# EAGLE board LogicBoard (EAGLE 9.6.2)
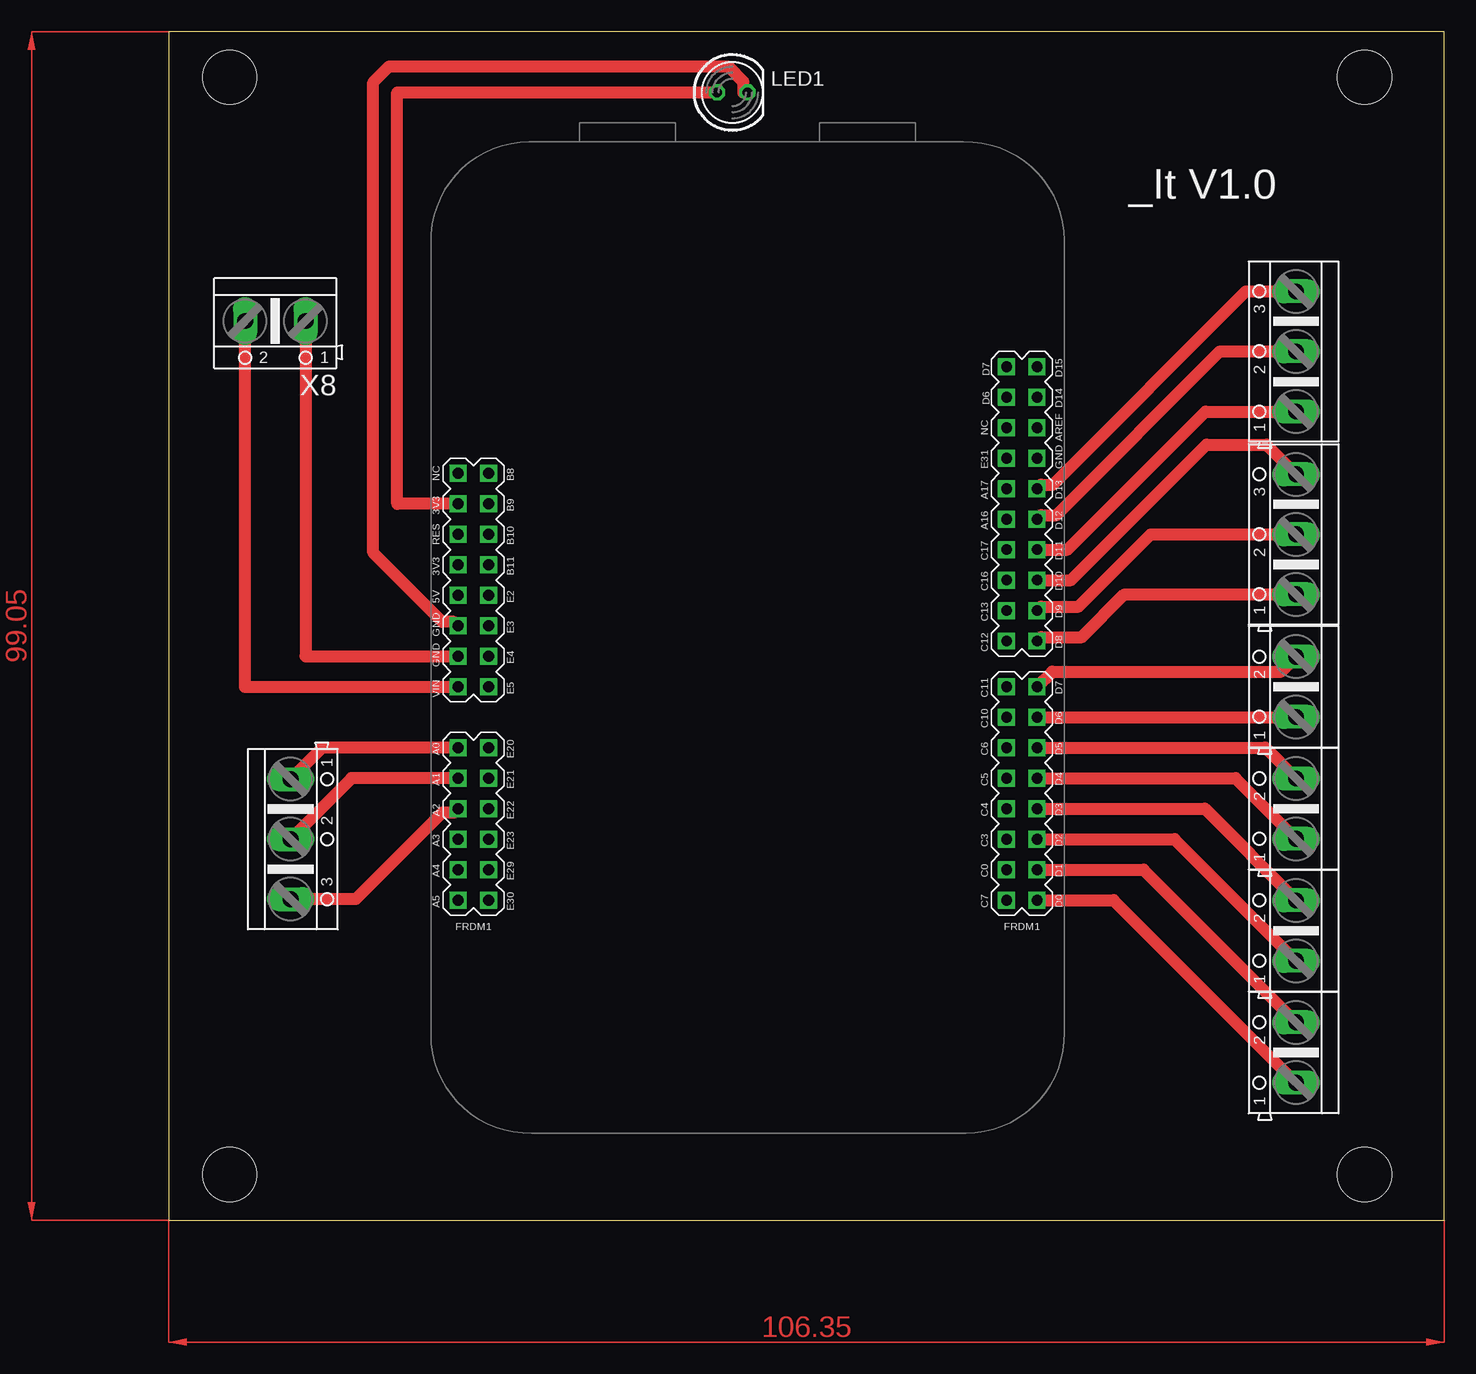
[diagram p0: board, top side]

Size 106.35 x 99.05 mm. Coordinates in mm from the lower left corner, seen from the top.
Outline: 0,0 106.35,0 106.35,99.05 0,99.05 0,0
Copper layers (1*16): Top 0.035mm / dielectric 1.5mm / Bottom 0.035mm
Design rules "default *": minimum track width 1mm, minimum drill 0.35mm, track to track 1mm, track to pad 1mm, pad to pad 6mil, via to via 6mil, smd to smd 6mil, copper to edge 40mil, drill to drill 6mil, minimum pad ring 10mil, minimum via ring 8mil, stop-mask expansion 4mil, vias tented up to drill 0mil, thermal gap 10mil
Holes 4.5 mm at 5.08,3.81 5.08,95.25 99.69,95.25 99.69,3.81

## Footprints (pad centres in the part's own frame; a part is rotated, then mirrored left to right if it is on the bottom)
FRDM_KL25Z_NORMAL = drill 0.9 square: 3V3 24.13,-15.24; 5V 24.13,-7.62; A0 24.13,5.08; A1 24.13,7.62; A2 24.13,10.16; A3 24.13,12.7; A4 24.13,15.24; A5 24.13,17.78; AREF -24.13,-21.59; D0 -24.13,17.78; D1 -24.13,15.24; D2 -24.13,12.7; D3 -24.13,10.16; D4 -24.13,7.62; D5 -24.13,5.08; D6 -24.13,2.54; D7 -24.13,0; D8 -24.13,-3.81; D9 -24.13,-6.35; D10 -24.13,-8.89; D11 -24.13,-11.43; D12 -24.13,-13.97; D13 -24.13,-16.51; D14 -24.13,-24.13; D15 -24.13,-26.67; GND0 24.13,-2.54; GND1 24.13,-5.08; GND2 -24.13,-19.05; NC1 24.13,-17.78; NC2 -21.59,-21.59; P3V3 24.13,-10.16; PTA16 -21.59,-13.97; PTA17 -21.59,-16.51; PTB8 21.59,-17.78; PTB9 21.59,-15.24; PTB10 21.59,-12.7; PTB11 21.59,-10.16; PTC0 -21.59,15.24; PTC3 -21.59,12.7; PTC4 -21.59,10.16; PTC5 -21.59,7.62; PTC6 -21.59,5.08; PTC7 -21.59,17.78; PTC10 -21.59,2.54; PTC11 -21.59,0; PTC12 -21.59,-3.81; PTC13 -21.59,-6.35; PTC16 -21.59,-8.89; PTC17 -21.59,-11.43; PTD6 -21.59,-24.13; PTD7 -21.59,-26.67; PTE2 21.59,-7.62; PTE3 21.59,-5.08; PTE4 21.59,-2.54; PTE5 21.59,0; PTE20 21.59,5.08; PTE21 21.59,7.62; PTE22 21.59,10.16; PTE23 21.59,12.7; PTE29 21.59,15.24; PTE30 21.59,17.78; PTE31 -21.59,-19.05; RESET 24.13,-12.7; VIN 24.13,0
LED5MM = drill 0.813 octagon: A -1.27,0; K 1.27,0
AK500/2 = drill 1.321 long: 1 -2.515,0; 2 2.515,0
AK500/3 = drill 1.321 long: 1 -5.004,0; 2 0,0; 3 5.004,0

## Placement (x,y rotation side)
FRDM1  FRDM-KL25ZNORMAL  [FRDM_KL25Z_NORMAL]  48.26,44.45 180 top
LED1  [LED5MM]  46.99,93.98 0 top
X1  [AK500/2]  93.98,44.45 90 top
X2  [AK500/2]  93.98,34.29 90 top
X3  [AK500/2]  93.98,24.13 90 top
X4  [AK500/2]  93.98,13.97 90 top
X5  [AK500/3]  10.16,31.75 270 top
X6  [AK500/3]  93.98,57.15 90 top
X7  [AK500/3]  93.98,72.39 90 top
X8  [AK500/2]  8.89,74.93 180 top

## Library data of the parts
FRDM1 = FRDM-KL25Z; AVAILABILITY: In Stock; DESCRIPTION: KL1x, KL2x, mbed-Enabled Development Freedom Kinetis ARM® Cortex®-M0+ MCU 32-Bit Embedded Evaluation Board; MF: NXP USA; MP: FRDM-KL25Z; PACKAGE: None; PRICE: None; PURCHASE-URL: https://pricing.snapeda.com/search/part/FRDM-KL25Z/?ref=eda
LED1 = led
X1-X8 = con-ptr500; OC_FARNELL: unknown; OC_NEWARK: unknown

## Nets
N$1: FRDM1.D7 X1.2
N$2: FRDM1.D6 X1.1
N$3: FRDM1.D5 X2.2
N$4: FRDM1.D4 X2.1
N$5: FRDM1.D3 X3.2
N$6: FRDM1.D2 X3.1
N$7: FRDM1.D1 X4.2
N$8: FRDM1.D0 X4.1
N$9: FRDM1.GND0 X8.1
N$10: FRDM1.VIN X8.2
N$11: FRDM1.A0 X5.1
N$12: FRDM1.A1 X5.2
N$13: FRDM1.A2 X5.3
N$14: FRDM1.D8 X6.1
N$15: FRDM1.D9 X6.2
N$16: FRDM1.D10 X6.3
N$17: FRDM1.D11 X7.1
N$18: FRDM1.D12 X7.2
N$19: FRDM1.D13 X7.3
N$20: FRDM1.PTD7
N$21: FRDM1.GND1 LED1.K
N$22: FRDM1.3V3 LED1.A

## Tracks (layer width: path | path; a pad name or v marks a point on that pad's centre or on a via)
N$1
  Top 1: FRDM1.D7 73.66,45.72 92.73,45.72 X1.2
N$2  (1 unrouted)
  Top 1: FRDM1.D6 93.98,41.91
N$3
  Top 1: FRDM1.D5 91.42,39.37 X2.2
N$4
  Top 1: FRDM1.D4 88.92,36.83 X2.1
N$5  (1 unrouted)
  Top 1: FRDM1.D3 86.36,34.29 93.98,26.67
N$6
  Top 1: FRDM1.D2 83.84,31.75 X3.1
N$7
  Top 1: FRDM1.D1 81.25,29.21 X4.2
N$8
  Top 1: FRDM1.D0 78.77,26.67 X4.1
N$9
  Top 1: X8.1 11.4,47.02 11.43,46.99 FRDM1.GND0
N$10
  Top 1: FRDM1.VIN 6.35,44.45 6.35,74.91 X8.2
N$11
  Top 1: FRDM1.A0 12.78,39.37 X5.1
N$12
  Top 1: X5.2 15.24,36.83 FRDM1.A1
N$13
  Top 1: FRDM1.A2 23.79,33.95 22.8,33.95 15.6,26.75 X5.3
N$14
  Top 1: FRDM1.D8 72.73,48.6 76.13,48.6 79.68,52.15 X6.1
N$15
  Top 1: FRDM1.D9 72.73,51.14 75.84,51.14 81.86,57.15 X6.2
N$16
  Top 1: FRDM1.D10 75.22,53.34 86.5,64.63 91.51,64.63 X6.3
N$17
  Top 1: FRDM1.D11 74.93,55.88 86.44,67.39 X7.1
N$18
  Top 1: FRDM1.D12 72.73,58.76 74,58.76 87.64,72.39 X7.2
N$19
  Top 1: FRDM1.D13 72.73,61.3 73.72,61.3 89.81,77.39 X7.3
N$21
  Top 1: FRDM1.GND1 23.79,49.87 22.8,49.87 17.05,55.62 17.05,94.81 18.38,96.14 46.62,96.14 47.88,94.88 47.88,93.98 LED1.K
N$22
  Top 1: FRDM1.3V3 19.05,59.69 19.05,93.98 LED1.A
(copper drawn outside any net)
  shapes: Top area x2

## Text on the board
tPlace: _It V1.0